# EAGLE board Placa (EAGLE 9.2.2)
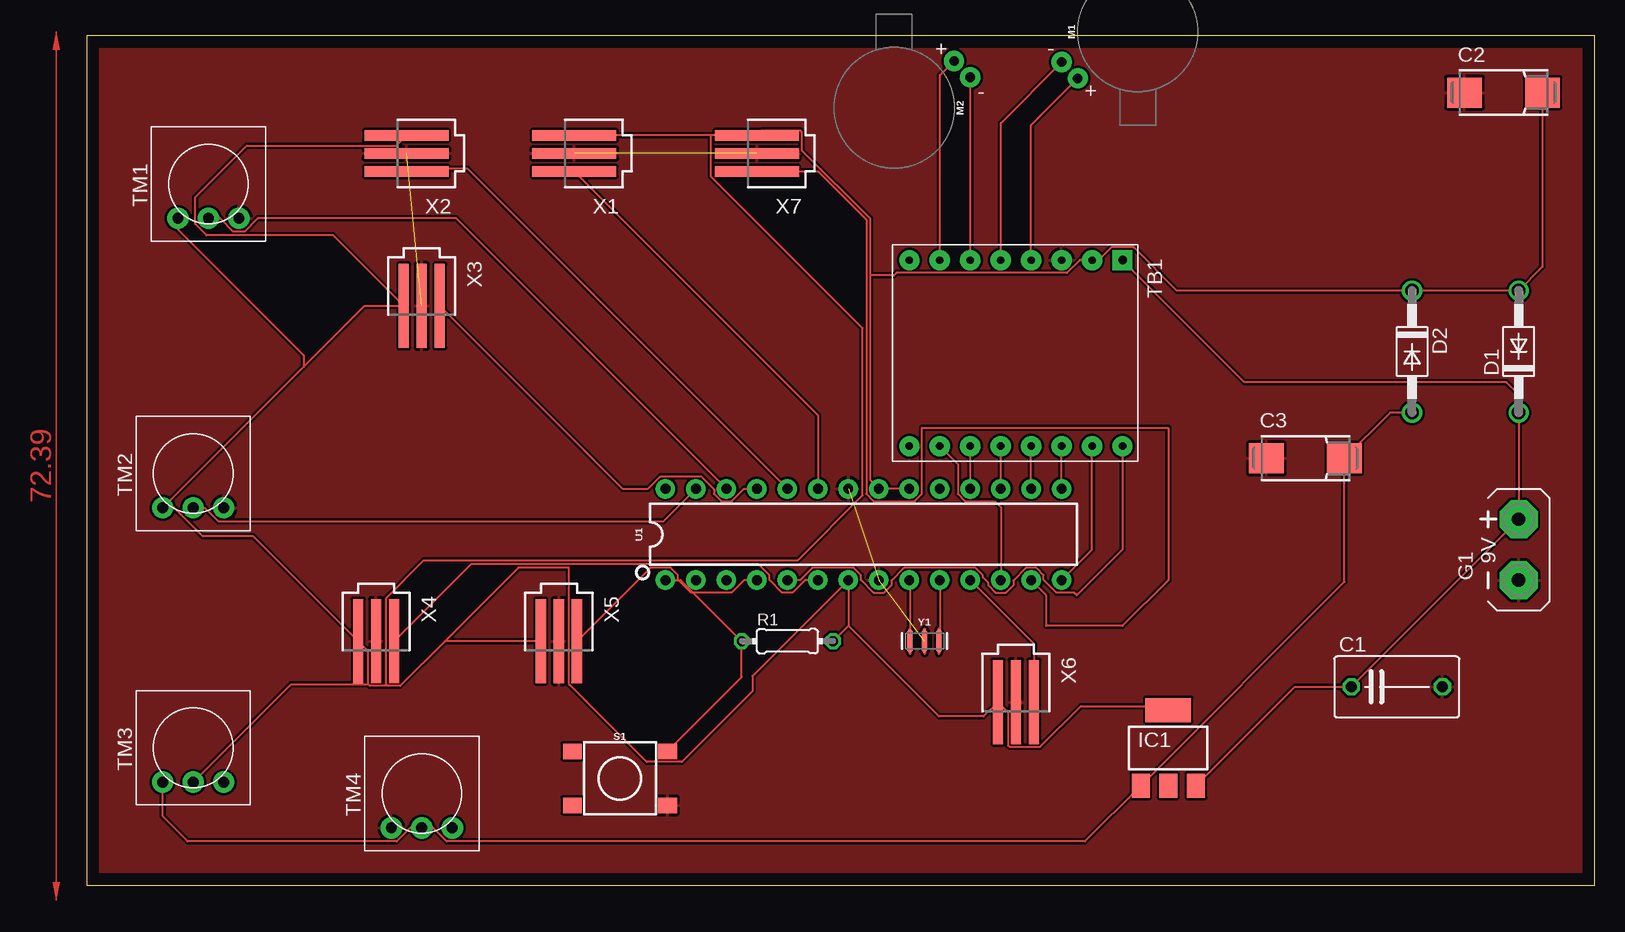
[diagram p0: board, top side]

Size 125.71 x 70.79 mm. Coordinates in mm from the lower left corner, seen from the top.
Outline: 0,0 125.71,0 125.71,70.79 0,70.79 0,0
Copper layers (1*16): Top 0.035mm / dielectric 1.5mm / Bottom 0.035mm
Design rules "default": minimum track width 6mil, minimum drill 0.35mm, track to track 6mil, track to pad 6mil, pad to pad 6mil, via to via 6mil, smd to smd 6mil, copper to edge 40mil, drill to drill 6mil, minimum pad ring 10mil, minimum via ring 8mil, stop-mask expansion 4mil, vias tented up to drill 0mil, thermal gap 10mil
Net classes: 0 default: clearance 0.205 mm

## Footprints (pad centres in the part's own frame; a part is rotated, then mirrored left to right if it is on the bottom)
C075-052X106 = drill 0.914 octagon: 1 -3.81,0; 2 3.81,0
085CS_1AR = smd 2.9 x 2.5: + 3.25,0; - -3.25,0
DO41-10 = drill 1.118: A 5.08,0; C -5.08,0
AB9V = drill 1.118 pad 3.15 octagon: + 0,2.54; - 0,-2.54
SOT223 = smd 1.5 x 2: 1 -2.3,-3.15; 2 0,-3.15; 3 2.3,-3.15 | smd 3.8 x 2: 4 0,3.15
VIBE-MOTOR-10MM = drill 0.8 pad 1.676: + -5,-3.9; - -6.35,-2.54
0204/7 = drill 0.813 octagon: 1 -3.81,0; 2 3.81,0
TACTILE_SWITCH_SMD_6.2MM_TALL = smd 1.55 x 1.3: A1 -3.975,-2.25; A2 3.975,-2.25; B1 -3.975,2.25; B2 3.975,2.25
TB6612FNG = drill 0.6 pad 1.676: A1 -7.62,-1.27; A2 -7.62,-3.81; AIN1 7.874,1.27; AIN2 7.874,3.81; B1 -7.62,-8.89; B2 -7.62,-6.35; BIN1 7.874,-3.81; BIN2 7.874,-6.35; GND1 -7.62,1.27; GND2 -7.62,-11.43; GND3 7.874,-11.43; PWMA 7.874,6.35; PWMB 7.874,-8.89; STBY 7.874,-1.27; VCC -7.62,3.81 | drill 0.7 pad 1.676 square: VM -7.62,6.35
TRIM-3386 = drill 0.9 pad 1.778: 1 -2.54,-2.857; 2 0,-2.857; 3 2.54,-2.857
DIP28 = drill 0.813 pad 1.626: 1 -16.51,-3.81; 2 -13.97,-3.81; 3 -11.43,-3.81; 4 -8.89,-3.81; 5 -6.35,-3.81; 6 -3.81,-3.81; 7 -1.27,-3.81; 8 1.27,-3.81; 9 3.81,-3.81; 10 6.35,-3.81; 11 8.89,-3.81; 12 11.43,-3.81; 13 13.97,-3.81; 14 16.51,-3.81; 15 16.51,3.81; 16 13.97,3.81; 17 11.43,3.81; 18 8.89,3.81; 19 6.35,3.81; 20 3.81,3.81; 21 1.27,3.81; 22 -1.27,3.81; 23 -3.81,3.81; 24 -6.35,3.81; 25 -8.89,3.81; 26 -11.43,3.81; 27 -13.97,3.81; 28 -16.51,3.81
87438-03 = smd 7 x 0.85: 1 0,1.5; 2 0,0; 3 0,-1.5
RESONATOR-SMD-3.2X1.3 = smd 0.45 x 1.905: 1 -1.2,0; 2 0,0; 3 1.2,0

## Placement (x,y rotation side)
C1  0.1uF  [C075-052X106]  109.22,16.51 0 top
C2  1uF  [085CS_1AR]  118.11,66.04 0 top
C3  10uF  [085CS_1AR]  101.6,35.56 0 top
D1  1N4002  [DO41-10]  119.38,44.45 90 top
D2  1N4002  [DO41-10]  110.49,44.45 270 top
G1  AB9V  [AB9V]  119.38,27.94 0 top
IC1  LM317MBSTT3  [SOT223]  90.17,11.43 0 top
M1  MOTOR10MM  [VIBE-MOTOR-10MM]  87.63,71.12 0 top
M2  MOTOR10MM  [VIBE-MOTOR-10MM]  67.31,64.77 180 top
R1  [0204/7]  58.42,20.32 0 top
S1  MOMENTARY-SWITCH-SPST-SMD-6.2MM-TALL  [TACTILE_SWITCH_SMD_6.2MM_TALL]  44.45,8.89 0 top
TB1  TB6612FNG  [TB6612FNG]  80.01,44.45 270 top
TM1  [TRIM-3386]  10.16,58.42 0 top
TM2  [TRIM-3386]  8.89,34.29 0 top
TM3  [TRIM-3386]  8.89,11.43 0 top
TM4  [TRIM-3386]  27.94,7.62 0 top
U1  328P  [DIP28]  64.77,29.21 0 top
X1  87438-03  [87438-03]  40.64,60.96 180 top
X2  87438-03  [87438-03]  26.67,60.96 180 top
X3  87438-03  [87438-03]  27.94,48.26 270 top
X4  87438-03  [87438-03]  24.13,20.32 270 top
X5  87438-03  [87438-03]  39.37,20.32 270 top
X6  87438-03  [87438-03]  77.47,15.24 270 top
X7  87438-03  [87438-03]  55.88,60.96 180 top
Y1  16MHz  [RESONATOR-SMD-3.2X1.3]  69.85,20.32 0 top

## Library data of the parts
C1 = rcl; SPICEPREFIX: C
C2 C3 R1 = resistor
D1 D2 = diode
G1 = battery
IC1 = v-reg; PARTNUMBER: LM317M
M1 M2 = SparkFun-Electromechanical; PROD_ID: COMP-08572; SF_SKU: ROB-08449
S1 = SparkFun-Switches; PROD_ID: SWCH-11966; SF_SKU: COM-12992
TB1 = TB6612FNG
TM1-TM4 = adafruit
U1 = SparkFun-IC-Microcontroller; PROD_ID: IC-09136
X1-X7 = con-molex; MF: MOLEX; OC_FARNELL: 1711328; OC_NEWARK: unknown
Y1 = SparkFun-Clocks; PROD_ID: XTAL-08900

## Nets
GND: C1.2 C2.- C3.- G1.- S1.A2 TB1.GND1 TM1.3 TM2.3 TM4.1 U1.8 U1.22 X1.2 X2.2 X3.2 X4.2 X5.2 X6.2 X7.2 Y1.2
N$1: U1.9 Y1.1
N$2: U1.10 Y1.3
N$3: R1.1 S1.B2 U1.1
N$4: TB1.AIN2 U1.14
N$5: TB1.AIN1 U1.15
N$6: M1.+ TB1.A1
N$7: M1.- TB1.A2
N$8: M2.- TB1.B2
N$9: M2.+ TB1.B1
N$10: TB1.PWMA U1.5
N$11: TB1.STBY U1.16
N$12: TB1.BIN1 U1.17
N$13: C3.+ D2.A IC1.1 TM3.1 TM4.2
N$14: U1.23 X1.1
N$15: U1.24 X2.1
N$16: U1.25 X3.1
N$17: U1.4 X5.1
N$18: U1.13 X7.1
N$19: U1.11 X6.1
N$20: U1.6 X4.1
N$21: TB1.BIN2 U1.18
N$22: TB1.PWMB U1.12
N$23: TM2.2 U1.27
N$25: TM1.2 U1.26
VIN: C1.1 D1.C G1.+ IC1.3 TB1.VM
VO: C2.+ D1.A D2.C IC1.4 R1.2 TB1.VCC TM1.1 TM2.1 TM3.2 U1.7 U1.20 U1.21 X1.3 X2.3 X3.3 X4.3 X5.3 X6.3 X7.3

## Tracks (layer width: path | path; a pad name or v marks a point on that pad's centre or on a via)
GND  (4 unrouted)
  pour Top: 0,71.12 0,0 125.73,0 125.73,71.12
N$1
  Top 0.152: U1.9 68.65,25.33 Y1.1
N$2
  Top 0.152: U1.10 71.12,20.39 Y1.3
N$3
  Top 0.152: S1.B2 54.61,17.33 R1.1 49.53,25.4 U1.1
N$4
  Top 0.152: U1.14 83.82,27.94 TB1.AIN2
N$5
  Top 0.152: U1.15 TB1.AIN1
N$6
  Top 0.152: TB1.A1 78.74,63.33 M1.+
N$7
  Top 0.152: TB1.A2 76.2,63.5 M1.-
N$8
  Top 0.152: TB1.B2 M2.-
N$9
  Top 0.152: TB1.B1 71.12,67.48 M2.+
N$10
  Top 0.152: TB1.PWMA 86.36,27.94 82.55,24.13 82.32,24.36 80.85,24.36 79.78,25.43 79.78,25.83 79.17,26.44 78.31,26.44 77.24,25.37 77.24,24.97 76.63,24.36 75.77,24.36 75.16,24.97 75.16,25.17 74.7,25.63 74.7,25.83 74.09,26.44 68.15,26.44 67.08,25.37 67.08,24.97 66.47,24.36 65.61,24.36 64.54,25.43 64.54,25.83 63.93,26.44 60.5,26.44 59.46,25.4 U1.5
N$11
  Top 0.152: U1.16 TB1.STBY
N$12
  Top 0.152: U1.17 TB1.BIN1
N$13
  Top 0.152: D2.A 108.66,39.37 C3.+ 104.85,25.26 IC1.1 83.24,3.64 30.02,3.64 28.9,4.76 TM4.2 26.98,4.76 25.86,3.64 8.43,3.64 6.35,5.72 TM3.1
N$14
  Top 0.152: X1.1 60.96,39.14 U1.23
N$15
  Top 0.152: U1.24 31.75,59.69 26.67,59.69 X2.1
N$16
  Top 0.152: X3.1 44.68,33.02 46.79,33.02 47.83,34.06 51.23,34.06 52.3,32.99 52.3,32.59 52.91,31.98 53.77,31.98 54.81,33.02 U1.25
N$17
  Top 0.152: U1.4 54.81,25.4 53.77,24.36 50.37,24.36 49.3,25.43 49.3,25.83 48.69,26.44 46.99,26.44 X5.1
N$18
  Top 0.152: X7.1 60.96,59.46 65,55.42 65,32.59 65.61,31.98 69.01,31.98 69.62,32.59 69.62,38.1 90.17,38.1 90.17,25.4 86.36,21.59 80.01,21.59 80.01,24.13 U1.13
N$19
  Top 0.152: X6.1 78.97,20.09 U1.11
N$20
  Top 0.152: U1.6 59.89,25.4 58.85,24.36 57.99,24.36 56.92,25.43 56.92,25.83 56.01,26.75 32.06,26.75 X4.1
N$21
  Top 0.152: U1.18 TB1.BIN2
N$22
  Top 0.152: U1.12 76.2,31.5 75.72,31.98 73.23,31.98 72.62,32.59 72.62,35.08 TB1.PWMB
N$23
  Top 0.152: TM2.2 9.85,31.43 10.97,30.31 48.1,30.31 U1.27
N$25
  Top 0.152: U1.26 30.8,55.56 14.28,55.56 13.16,54.45 12.24,54.45 11.12,55.56 TM1.2
VIN
  Top 0.152: IC1.3 100.7,16.51 C1.1 G1.+ D1.C 119.38,40.88 118.35,41.91 96.52,41.91 TB1.VM
VO
  Top 0.152: 63.5,21.59 U1.7 55.5,17.4 55.5,16.14 49.62,10.26 46.68,10.26 40.22,16.73 40.22,26.44 36,26.44 29.88,20.32 | 63.5,21.59 R1.2 | U1.20 U1.21 65.3,33.76 65.3,50.8 | 52.07,62.46 X7.3 56.3,62.88 59.48,62.88 59.61,62.75 59.61,61.25 65.3,55.55 65.3,50.8 | 52.07,62.46 X1.3 | 63.5,21.59 71.04,14.05 74.78,14.05 X6.3 76.82,14.39 76.82,11.64 76.95,11.51 79.49,11.51 82.89,14.91 89.84,14.91 IC1.4 | C2.+ 121.36,51.51 D1.A D2.C 90.9,49.53 87.29,53.14 85.43,53.14 84.36,52.07 TB1.VCC 82.79,52.07 81.72,51 67.51,51 67.31,50.8 65.3,50.8 | 23.48,16.73 23.61,16.59 25.11,16.59 | X5.3 29.88,20.32 | 23.48,16.73 23.48,19.47 X4.3 13.91,29.05 9.7,29.05 7.31,31.43 TM2.1 18.1,43.18 | 29.88,20.32 26.15,16.59 25.11,16.59 | TM3.2 17.04,16.73 23.48,16.73 | 18.1,43.18 23.18,48.26 X3.3 20.56,54.14 10,54.14 9.04,55.1 9.04,57.29 13.36,61.61 25.82,61.61 X2.3 | TM1.1 7.62,54.61 18.1,44.13 18.1,43.18 | 25.11,16.59 24.98,16.73 24.98,23.91 28.11,27.05 59.28,27.05 64.69,32.46 64.69,46.4 52.07,59.02 52.07,62.46
(copper drawn outside any net)
  shapes: Top area x2